# Altium PCB Accumulator_HotDog_v2.PcbDoc
Units mm, origin at the board's own origin, x right, y up, seen from the top; angles counter-clockwise.
Board outline 537 x 59.5 mm, 2 copper layers (Top Layer, Bottom Layer), stack 1.27 mm thick; 117 components, 86 nets, 247 pads, 10 vias.
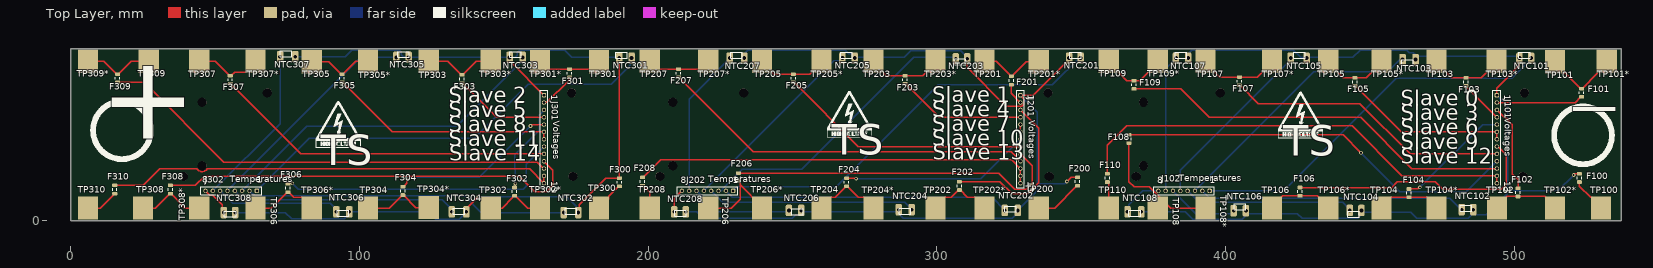
[diagram p0: Top Layer view]
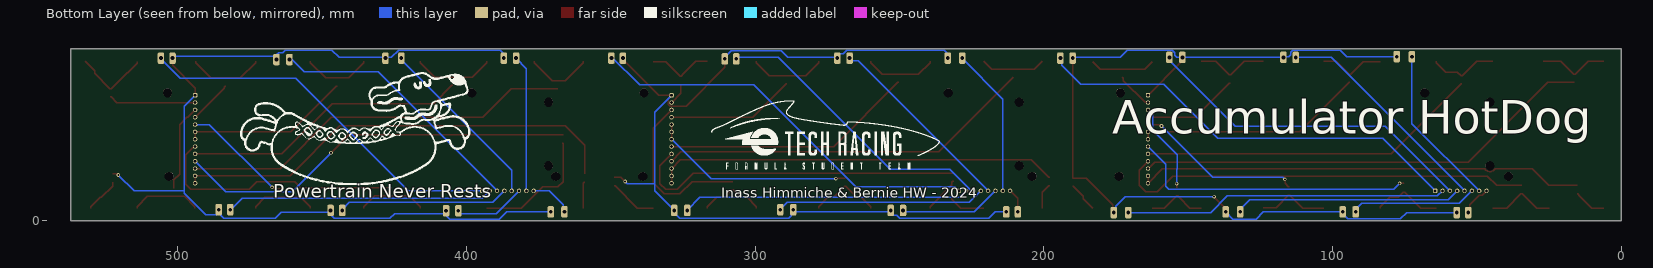
[diagram p1: Bottom Layer view, seen from below]
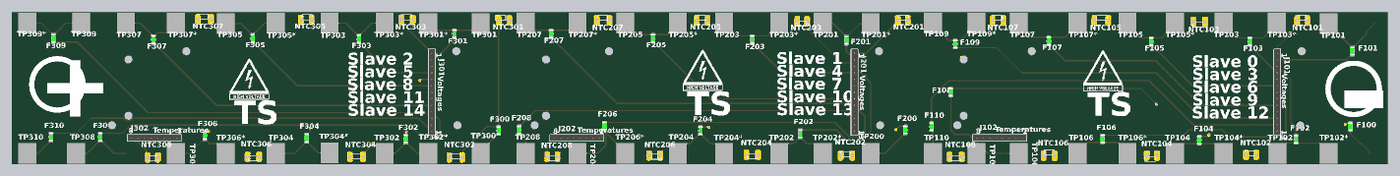
[diagram p2: 3D render of the assembled board from above, using the file's embedded part models]

## Layer stack, top to bottom
Top Solder: solder mask 0.01, Solder Resist, Dk 3.5
Top Layer: signal copper 0.035
Dielectric 2: prepreg 0.1, PP-006, Dk 4.1
Dielectric 1: dielectric 1, FR-4, Dk 4.8
Dielectric 3: prepreg 0.1, PP-006, Dk 4.1
Bottom Layer: signal copper 0.035
Bottom Solder: solder mask 0.01, Solder Resist, Dk 3.5

## Board outline
0,0 0,59.5 537,59.5 537,0

## Design rules (kind name [scope] priority, off if disabled: settings)
Clearance [All] p1: gap=0.2 ignorepadtopadclearanceinfootprint=FALSE
ComponentClearance [All] p1: gap=0.2 collisioncheckmode=3 verticalgap=0.2 showdistances=FALSE
HoleSize [All] p1: absolutevalues=TRUE maxlimit=5 minlimit=0.15 maxpercent=80.000 minpercent=20.000
PlaneClearance [All] p1: clearance=0.5
PlaneConnect [All] p1: planeconnectstyle=Relief reliefexpansion=0.5 reliefentries=4 reliefconductorwidth=0.2 reliefairgap=0.5
PolygonConnect [All] p1: connectstyle=Direct reliefconductorwidth=0.2 reliefentries=4 polygonreliefangle="45 Angle" airgapwidth=0.5
RoomDefinition [InComponentClass('Accumulator_HotDog_v2')] p1: confinementstyle=ConfineIn formatcopy=TRUE lockcomponents=FALSE outline 0,0 537,0 537,59.5 0,59.5
RoutingCorners [All] p1: cornerstyle=45-Degree minsetback=2 maxsetback=2.5
RoutingVias [All] p1: holewidth=0.3 width=0.7 viastyle="Through Hole" minholewidth=0.2 minwidth=0.5 maxholewidth=5 maxwidth=8
SilkToSilkClearance [All] p1: silktosilkclearance=0
SolderMaskExpansion [All] p1: expansion=0.102 istentingtop=FALSE
Width [All] p1: maxlimit=5 minlimit=0.2 preferedwidth=0.5
24 further rules are at their usual default settings.

## Components (designator, comment, footprint, x,y, rotation, side; value= is the part's Value field where it differs from the comment)
F100 "0437001.WRA" Fuse_1206 522.5,14.75 r90 top
F101 "0437001.WRA" Fuse_1206 523.25,44.25 r270 top
F102 "0437001.WRA" Fuse_1206 501.25,9.75 r90 top
F103 "0437001.WRA" Fuse_1206 483.25,48 r270 top
F104 "0437001.WRA" Fuse_1206 463.5,9.5 r90 top
F105 "0437001.WRA" Fuse_1206 444.75,48 r270 top
F106 "0437001.WRA" Fuse_1206 425.75,10 r90 top
F107 "0437001.WRA" Fuse_1206 404.75,48.25 r270 top
F108 "0437001.WRA" Fuse_1206 366.5,28.25 r90 top
F109 "0437001.WRA" Fuse_1206 368.25,47 r270 top
F110 "0437001.WRA" Fuse_1206 359,14.75 r90 top
F200 "0437001.WRA" Fuse_1206 348.75,13.5 r90 top
F201 "0437001.WRA" Fuse_1206 325.75,48.5 r270 top
F202 "0437001.WRA" Fuse_1206 307.75,12 r90 top
F203 "0437001.WRA" Fuse_1206 289,48.75 r270 top
F204 "0437001.WRA" Fuse_1206 268.75,13.25 r90 top
F205 "0437001.WRA" Fuse_1206 250.25,49.25 r270 top
F206 "0437001.WRA" Fuse_1206 231.25,15 r90 top
F207 "0437001.WRA" Fuse_1206 210.5,51 r270 top
F208 "0437001.WRA" Fuse_1206 198,13.5 r90 top
F300 "0437001.WRA" Fuse_1206 190,13.25 r90 top
F301 "0437001.WRA" Fuse_1206 172.75,51 r270 top
F302 "0437001.WRA" Fuse_1206 153.75,10 r90 top
F303 "0437001.WRA" Fuse_1206 135.5,49 r270 top
F304 "0437001.WRA" Fuse_1206 115,10.25 r90 top
F305 "0437001.WRA" Fuse_1206 94,49.25 r270 top
F306 "0437001.WRA" Fuse_1206 75.25,11.25 r90 top
F307 "0437001.WRA" Fuse_1206 55.25,48.75 r270 top
F308 "0437001.WRA" Fuse_1206 34.5,10.75 r90 top
F309 "0437001.WRA" Fuse_1206 16.25,49.25 r270 top
F310 "0437001.WRA" Fuse_1206 15.25,10.75 r90 top
J101 "WR-PHD 13 socket header" 61301311821 493.9,28.155 r270 top
J102 "J_WR-PHD 8pin Socket Header" 61300811821 385.55,10.29 r180 top
J201 "WR-PHD 13 socket header" 61301311821 328.9,28.155 r270 top
J202 "J_WR-PHD 8pin Socket Header" 61300811821 220.55,10.29 r180 top
J301 "WR-PHD 13 socket header" 61301311821 163.9,28.155 r270 top
J302 "J_WR-PHD 8pin Socket Header" 61300811821 55.55,10.29 r180 top
NTC101 "NXRT15XV103FA1B040" NTC_NXRT15XV103FA1B040#1 503.5,57.25 r0 top
NTC102 "NXRT15XV103FA1B040" NTC_NXRT15XV103FA1B040#2 483.25,4.25 r180 top
NTC103 "NXRT15XV103FA1B040" NTC_NXRT15XV103FA1B040#3 463,54.75 r180 top
NTC104 "NXRT15XV103FA1B040" NTC_NXRT15XV103FA1B040#4 444.25,2.146 r180 top
NTC105 "NXRT15XV103FA1B040" NTC_NXRT15XV103FA1B040#5 425.5,57.25 r0 top
NTC106 "NXRT15XV103FA1B040" NTC_NXRT15XV103FA1B040#6 405,4.75 r0 top
NTC107 "NXRT15XV103FA1B040" NTC_NXRT15XV103FA1B040#7 384.5,57.25 r0 top
NTC108 "NXRT15XV103FA1B040" NTC_NXRT15XV103FA1B040#8 368.5,2.5 r0 top
NTC201 "NXRT15XV103FA1B040" NTC_NXRT15XV103FA1B040#9 348,57.25 r0 top
NTC202 "NXRT15XV103FA1B040" NTC_NXRT15XV103FA1B040#10 325.5,4 r180 top
NTC203 "NXRT15XV103FA1B040" NTC_NXRT15XV103FA1B040#11 308,55 r180 top
NTC204 "NXRT15XV103FA1B040" NTC_NXRT15XV103FA1B040#12 289,3.25 r0 top
NTC205 "NXRT15XV103FA1B040" NTC_NXRT15XV103FA1B040#13 268.75,57.25 r0 top
NTC206 "NXRT15XV103FA1B040" NTC_NXRT15XV103FA1B040#14 251.75,3 r0 top
NTC207 "NXRT15XV103FA1B040" NTC_NXRT15XV103FA1B040#15 230.5,57.25 r0 top
NTC208 "NXRT15XV103FA1B040" NTC_NXRT15XV103FA1B040#16 211.25,2.5 r0 top
NTC301 "NXRT15XV103FA1B040" NTC_NXRT15XV103FA1B040#17 190.75,57.25 r0 top
NTC302 "NXRT15XV103FA1B040" NTC_NXRT15XV103FA1B040#18 173.25,3.25 r180 top
NTC303 "NXRT15XV103FA1B040" NTC_NXRT15XV103FA1B040#19 154,57.5 r0 top
NTC304 "NXRT15XV103FA1B040" NTC_NXRT15XV103FA1B040#20 134.5,3.25 r180 top
NTC305 "NXRT15XV103FA1B040" NTC_NXRT15XV103FA1B040#21 115.25,57.5 r0 top
NTC306 "NXRT15XV103FA1B040" NTC_NXRT15XV103FA1B040#12 94.25,2.5 r0 top
NTC307 "NXRT15XV103FA1B040" NTC_NXRT15XV103FA1B040#22 74.5,57.75 r0 top
NTC308 "NXRT15XV103FA1B040" NTC_NXRT15XV103FA1B040#16 55.25,2.25 r0 top
TP100 "TestPoint" TestPoint#1 547.5,2.5 r90 top
TP101 "TestPoint" TestPoint#2 536.25,54.58 r90 top
TP101* "TestPoint" TestPoint#3 542.5,55 r90 top
TP102 "TestPoint" TestPoint#4 515,2.5 r90 top
TP102* "TestPoint" TestPoint#5 525,2.5 r90 top
TP103 "TestPoint" TestPoint#6 496,55 r90 top
TP103* "TestPoint" TestPoint#7 507.75,55 r90 top
TP104 "TestPoint" TestPoint#8 467.5,5 r90 top
TP104* "TestPoint" TestPoint#9 482.5,5 r90 top
TP105 "TestPoint" TestPoint#10 453.5,54.83 r90 top
TP105* "TestPoint" TestPoint#11 463,54.83 r90 top
TP106 "TestPoint" TestPoint#12 420,2.5 r90 top
TP106* "TestPoint" TestPoint#13 435,2.5 r90 top
TP107 "TestPoint" TestPoint#14 412.5,54.83 r90 top
TP107* "TestPoint" TestPoint#15 425.75,54.83 r90 top
TP108 "TestPoint" TestPoint#16 397.5,3.42 r90 top
TP108* "TestPoint" TestPoint#13 392.5,2.5 r90 top
TP109 "TestPoint" TestPoint#15 369.25,54.83 r90 top
TP109* "TestPoint" TestPoint#17 383.5,55 r90 top
TP110 "TestPoint" TestPoint#18 362.5,5 r90 top
TP200 "TestPoint" TestPoint#19 335.75,2.5 r90 top
TP201 "TestPoint" TestPoint#20 320.75,54.83 r90 top
TP201* "TestPoint" TestPoint#21 335.5,54.66 r90 top
TP202 "TestPoint" TestPoint#22 307.5,2.5 r90 top
TP202* "TestPoint" TestPoint#23 325,5 r90 top
TP203 "TestPoint" TestPoint#24 287.5,52.5 r90 top
TP203* "TestPoint" TestPoint#25 298,52.33 r90 top
TP204 "TestPoint" TestPoint#26 272.5,5 r90 top
TP204* "TestPoint" TestPoint#27 285,5 r90 top
TP205 "TestPoint" TestPoint#28 245,55 r90 top
TP205* "TestPoint" TestPoint#29 251.25,54.83 r90 top
TP206 "TestPoint" TestPoint#30 227.5,5 r90 top
TP206* "TestPoint" TestPoint#31 240,5 r90 top
TP207 "TestPoint" TestPoint#32 212.5,55 r90 top
TP207* "TestPoint" TestPoint#33 222.5,55 r90 top
TP208 "TestPoint" TestPoint#34 181.25,5.17 r90 top
TP300 "TestPoint" TestPoint#35 162.5,2.92 r90 top
TP301 "TestPoint" TestPoint#36 159.5,54.66 r90 top
TP301* "TestPoint" TestPoint#37 142.5,54.41 r90 top
TP302 "TestPoint" TestPoint#38 134.75,2.67 r90 top
TP302* "TestPoint" TestPoint#39 142.25,5.17 r90 top
TP303 "TestPoint" TestPoint#40 108,52.33 r90 top
TP303* "TestPoint" TestPoint#41 114.5,52.33 r90 top
TP304 "TestPoint" TestPoint#42 111.25,5.25 r90 top
TP304* "TestPoint" TestPoint#43 118.5,5.17 r90 top
TP305 "TestPoint" TestPoint#44 79.25,52.16 r90 top
TP305* "TestPoint" TestPoint#45 85.25,52.33 r90 top
TP306 "TestPoint" TestPoint#46 81.5,2.67 r90 top
TP306* "TestPoint" TestPoint#47 89,5 r90 top
TP307 "TestPoint" TestPoint#48 44.25,54.83 r90 top
TP307* "TestPoint" TestPoint#49 54.25,54.58 r90 top
TP308 "TestPoint" TestPoint#50 45,5 r90 top
TP308* "TestPoint" TestPoint#51 58.5,-10.5 r90 top
TP309 "TestPoint" TestPoint#52 40,55 r90 top
TP309* "TestPoint" TestPoint#53 12.5,55 r90 top
TP310 "TestPoint" TestPoint#54 12.5,5 r90 top

## Footprints (in the part's own frame and the unit in brackets; to place one, negate y for a bottom-side part, rotate by r counter-clockwise, add the part's x,y. Pads: shape width x height; smd on the part's side, far side on the other; paste and mask are expansions set on the pad)
61300811821 [mm] "Socket Header, Pitch 2.54 mm, THT, Vertical, single row, 8p"
  rrect50% 1.52x1.52 hole 1.02: 1(-8.89,0)
  round 1.52 hole 1.02: 2(-6.35,0) 3(-3.81,0) 4(-1.27,0) 5(1.27,0) 6(3.81,0) 7(6.35,0) 8(8.89,0)
  silkscreen extent -10.54,-1.35 10.54,1.35, body extent -10.41,-1.25 10.41,1.25, height 8.55
61301311821 [mm] "Socket Header, Pitch 2.54 mm, THT, Vertical, single row, 13p"
  rrect50% 1.52x1.52 hole 1.02: 1(-15.24,0)
  round 1.52 hole 1.02: 2(-12.7,0) 3(-10.16,0) 4(-7.62,0) 5(-5.08,0) 6(-2.54,0) 7(0,0) 8(2.54,0) 9(5.08,0) 10(7.62,0) 11(10.16,0) 12(12.7,0) 13(15.24,0)
  silkscreen extent -16.89,-1.35 16.89,1.35, body extent -16.76,-1.25 16.76,1.25, height 8.55
Fuse_1206 [mm] "Chip Resistor, 2-Leads, Body 3,20x1,58mm, IPC Medium Density"
  rrect50% 1.25x1.75 smd: 1(-1.425,0) 2(1.425,0)
  silkscreen extent -0.4,-0.77 0.4,0.77, body extent -1.6,-0.79 1.6,0.79, height 0.86
NTC_NXRT15XV103FA1B040#1 [mm]
  rrect50% 2.25x4 hole 1.3: 1(-1.75,-1) 2(2.25,-1)
  silkscreen extent -2,-1 2,1
NTC_NXRT15XV103FA1B040#2 [mm]
  rrect50% 2.25x4 hole 1.3: 1(-2.5,0.5) 2(1.5,0.5)
  silkscreen extent -2,-1 2,1
NTC_NXRT15XV103FA1B040#3 [mm]
  rrect50% 2.25x4 hole 1.3: 1(-2.75,-1) 2(1.75,-1)
  silkscreen extent -2,-1 2,1
NTC_NXRT15XV103FA1B040#4 [mm]
  rrect50% 2.25x4 hole 1.3: 1(-2.75,-1.354) 2(1.25,-1.354)
  silkscreen extent -2,-1 2,1
NTC_NXRT15XV103FA1B040#5 [mm]
  rrect50% 2.25x4 hole 1.3: 1(-3,-1) 2(2.5,-1)
  silkscreen extent -2,-1 2,1
NTC_NXRT15XV103FA1B040#6 [mm]
  rrect50% 2.25x4 hole 1.3: 1(-2.25,-1.354) 2(2,-1.354)
  silkscreen extent -2,-1 2,1
NTC_NXRT15XV103FA1B040#7 [mm]
  rrect50% 2.25x4 hole 1.3: 1(-1.75,-1) 2(2.5,-1)
  silkscreen extent -2,-1 2,1
NTC_NXRT15XV103FA1B040#8 [mm]
  rrect50% 2.25x4 hole 1.3: 1(-2.5,0.5) 2(2.25,0.5)
  silkscreen extent -2,-1 2,1
NTC_NXRT15XV103FA1B040#9 [mm]
  rrect50% 2.25x4 hole 1.3: 1(-2.25,-1) 2(1.75,-1)
  silkscreen extent -2,-1 2,1
NTC_NXRT15XV103FA1B040#10 [mm]
  rrect50% 2.25x4 hole 1.3: 1(-2.5,0.5) 2(2,0.5)
  silkscreen extent -2,-1 2,1
NTC_NXRT15XV103FA1B040#11 [mm]
  rrect50% 2.25x4 hole 1.3: 1(-2.5,-1) 2(1.5,-1)
  silkscreen extent -2,-1 2,1
NTC_NXRT15XV103FA1B040#12 [mm]
  rrect50% 2.25x4 hole 1.3: 1(-2.25,0.5) 2(2.25,0.5)
  silkscreen extent -2,-1 2,1
NTC_NXRT15XV103FA1B040#13 [mm]
  rrect50% 2.25x4 hole 1.3: 1(-1.5,-1) 2(2.75,-1)
  silkscreen extent -2,-1 2,1
NTC_NXRT15XV103FA1B040#14 [mm]
  rrect50% 2.25x4 hole 1.3: 1(-3,0.5) 2(1.25,0.5)
  silkscreen extent -2,-1 2,1
NTC_NXRT15XV103FA1B040#15 [mm]
  rrect50% 2.25x4 hole 1.3: 1(-2.25,-1) 2(2.75,-1)
  silkscreen extent -2,-1 2,1
NTC_NXRT15XV103FA1B040#16 [mm]
  rrect50% 2.25x4 hole 1.3: 1(-2.25,0.5) 2(1.75,0.5)
  silkscreen extent -2,-1 2,1
NTC_NXRT15XV103FA1B040#17 [mm]
  rrect50% 2.25x4 hole 1.3: 1(-0.75,-1) 2(3.5,-1)
  silkscreen extent -2,-1 2,1
NTC_NXRT15XV103FA1B040#18 [mm]
  rrect50% 2.25x4 hole 1.3: 1(-2.5,0.5) 2(2.5,0.5)
  silkscreen extent -2,-1 2,1
NTC_NXRT15XV103FA1B040#19 [mm]
  rrect50% 2.25x4 hole 1.3: 1(-2,-1) 2(2.5,-1)
  silkscreen extent -2,-1 2,1
NTC_NXRT15XV103FA1B040#20 [mm]
  rrect50% 2.25x4 hole 1.3: 1(-2.5,0.25) 2(2.5,0.25)
  silkscreen extent -2,-1 2,1
NTC_NXRT15XV103FA1B040#21 [mm]
  rrect50% 2.25x4 hole 1.3: 1(-2.5,-1) 2(1.75,-1)
  silkscreen extent -2,-1 2,1
NTC_NXRT15XV103FA1B040#22 [mm]
  rrect50% 2.25x4 hole 1.3: 1(-2,-1) 2(3.25,-1)
  silkscreen extent -2,-1 2,1
TestPoint#1 [mm]
  rect 8x7 smd: 1(1.83,17.5)
TestPoint#2 [mm]
  rect 8x7 smd: 1(0.42,22.25)
TestPoint#3 [mm]
  rect 8x7 smd: 1(0.17,10.5)
TestPoint#4 [mm]
  rect 8x7 smd: 1(1.83,21)
TestPoint#5 [mm]
  rect 8x7 smd: 1(1.83,11)
TestPoint#6 [mm]
  rect 8x7 smd: 1(0.17,23)
TestPoint#7 [mm]
  rect 8x7 smd: 1(0.17,14)
TestPoint#8 [mm]
  rect 8x7 smd: 1(-0.67,13.5)
TestPoint#9 [mm]
  rect 8x7 smd: 1(-0.67,9.5)
TestPoint#10 [mm]
  rect 8x7 smd: 1(0.34,18)
TestPoint#11 [mm]
  rect 8x7 smd: 1(0.34,9)
TestPoint#12 [mm]
  rect 8x7 smd: 1(1.83,4)
TestPoint#13 [mm]
  rect 8x7 smd: 1(1.83,-0.5)
TestPoint#14 [mm]
  rect 8x7 smd: 1(0.34,19.5)
TestPoint#15 [mm]
  rect 8x7 smd: 1(0.34,9.75)
TestPoint#16 [mm]
  rect 8x7 smd: 1(0.91,21)
TestPoint#17 [mm]
  rect 8x7 smd: 1(0.17,7)
TestPoint#18 [mm]
  rect 8x7 smd: 1(-0.67,3)
TestPoint#19 [mm]
  rect 8x7 smd: 1(1.83,0.5)
TestPoint#20 [mm]
  rect 8x7 smd: 1(0.34,4.25)
TestPoint#21 [mm]
  rect 8x7 smd: 1(0.34,0.25)
TestPoint#22 [mm]
  rect 8x7 smd: 1(1.83,8)
TestPoint#23 [mm]
  rect 8x7 smd: 1(-0.67,8.5)
TestPoint#24 [mm]
  rect 8x7 smd: 1(2.67,9.5)
TestPoint#25 [mm]
  rect 8x7 smd: 1(2.84,-1.5)
TestPoint#26 [mm]
  rect 8x7 smd: 1(-0.67,12.5)
TestPoint#27 [mm]
  rect 8x7 smd: 1(-0.67,7)
TestPoint#28 [mm]
  rect 8x7 smd: 1(0.17,5.6)
TestPoint#29 [mm]
  rect 8x7 smd: 1(0.34,-8.75)
TestPoint#30 [mm]
  rect 8x7 smd: 1(-0.67,6.7)
TestPoint#31 [mm]
  rect 8x7 smd: 1(-0.67,0.6)
TestPoint#32 [mm]
  rect 8x7 smd: 1(0.17,12)
TestPoint#33 [mm]
  rect 8x7 smd: 1(0.17,1.7)
TestPoint#34 [mm]
  rect 8x7 smd: 1(-0.84,-19.25)
TestPoint#35 [mm]
  rect 8x7 smd: 1(1.41,-20.5)
TestPoint#36 [mm]
  rect 8x7 smd: 1(0.34,-23.5)
TestPoint#37 [mm]
  rect 8x7 smd: 1(0.59,-20)
TestPoint#38 [mm]
  rect 8x7 smd: 1(1.66,-10.75)
TestPoint#39 [mm]
  rect 8x7 smd: 1(-0.84,-20.25)
TestPoint#40 [mm]
  rect 8x7 smd: 1(2.84,-16)
TestPoint#41 [mm]
  rect 8x7 smd: 1(2.84,-31)
TestPoint#42 [mm]
  rect 8x7 smd: 1(-0.92,8.25)
TestPoint#43 [mm]
  rect 8x7 smd: 1(-0.67,-5.5)
TestPoint#44 [mm]
  rect 8x7 smd: 1(2.84,-4.25)
TestPoint#45 [mm]
  rect 8x7 smd: 1(2.84,-17.75)
TestPoint#46 [mm]
  rect 8x7 smd: 1(1.66,17.5)
TestPoint#47 [mm]
  rect 8x7 smd: 1(-0.67,5.5)
TestPoint#48 [mm]
  rect 8x7 smd: 1(0.34,-0.25)
TestPoint#49 [mm]
  rect 8x7 smd: 1(0.59,-9.75)
TestPoint#50 [mm]
  rect 8x7 smd: 1(-0.67,20)
TestPoint#51 [mm]
  rect 8x7 smd: 1(14.83,14)
TestPoint#52 [mm]
  rect 8x7 smd: 1(0.17,13)
TestPoint#53 [mm]
  rect 8x7 smd: 1(0.17,6.5)
TestPoint#54 [mm]
  rect 8x7 smd mask+0.102: 1(-0.67,6.5)

## Part data
F100 F101 F102 F103 F104 F105 F106 F107 F108 F109 F110 F200 F201 F202 F203 F204 F205 F206 F207 F208 F300 F301 F302 F303 F304 F305 F306 F307 F308 F309 F310: library part Fuse_1A_63V_1206, "Fuse Chip Fast Acting 1A 63V SMD Solder Pad 1206 Ceramic T/R Automotive", Case Code (Imperial)=1206, Case Code (Metric)=3216, Current Rating=1A, Manufacturer=Littelfuse, Max Operating Temperature=150°C, Min Operating Temperature=-55°C, Supplier Part Number 1=F10001CT-ND, Voltage Rating (AC)=63V, Approvals=CSA,cURus, Case/Package=1206, Category=Fuses, ComponentLink1Description=https://www.littelfuse.com/~/media/electronics/datasheets/fuses/littelfuse_fuse_437a_datasheet.pdf.pdf?src-supplier=Digi-Key, ComponentLink1URL=https://www.littelfuse.com/~/media/electronics/datasheets/fuses/littelfuse_fuse_437a_datasheet.pdf.pdf?src-supplier=Digi-Key, ComponentLink2Description="Where buy it", ComponentLink2URL=https://www.mouser.es/ProductDetail/Littelfuse/0437001WRA?qs=DXv0QSHKF4z9CJhPXjxR%252BA%3D%3D, Fuse Type="Board Mount (Cartridge Style Excluded)", Manufacturer Part Number=0437001.WRA, Mount="Surface Mount", Packaging="Tape and Reel", Pricing 1="1=1,52000, 5=1,47000, 10=1,37600, 50=1,13860, 100=0,94880, 250=0,92508, 500=0,78276, 1000=0,68788 (USD)", RoHS=Yes, Stock 1=5820, Supplier 1=Digi-Key, Voltage Rating (DC)=63V
J101 J201 J301: library part "J_WR-PHD 13pin Socket Header", "13 pin Socket Header 61301311821", ComponentLink1Description=Datasheet, ComponentLink1URL=https://www.we-online.com/components/products/datasheet/61301311821.pdf
J102 J202 J302: "8pin Socket Header 2.54 mm", Supplier Part Number 1=732-61300811821-ND, Supplier 1=Digi-Key
NTC101 NTC102 NTC103 NTC104 NTC105 NTC106 NTC107 NTC108 NTC201 NTC202 NTC203 NTC204 NTC205 NTC206 NTC207 NTC208 NTC301 NTC302 NTC303 NTC304 NTC305 NTC306 NTC307 NTC308: library part NTC_NXRT15XV103FA1B040, "NXR Series 10 kOhm 3900 K ±1% Bead NTC Thermistor Sensor", Manufacturer 1=Murata, Max Operating Temperature=125°C, Max Power Dissipation=7.5mW, Min Operating Temperature=-40°C, Package Quantity=500, Resistance=10kR, Resistance Tolerance=1%, Supplier Part Number 1=490-7171-ND, Category=Thermistors, ComponentLink1Description=http://www.mouser.com/ds/2/281/r44e-3685.pdf?src-supplier=Mouser, ComponentLink1URL=http://www.mouser.com/ds/2/281/r44e-3685.pdf?src-supplier=Mouser, ComponentLink2Description=https://www.murata.com/en-us/products/productdata/8796838297630/S0423E.pdf?src-supplier=Digi-Key, ComponentLink2URL=https://www.murata.com/en-us/products/productdata/8796838297630/S0423E.pdf?src-supplier=Digi-Key, ComponentLink3Description=http://www.murata.com/~/media/webrenewal/support/library/catalog/products/thermistor/ntc/r44e.ashx?src-supplier=Avnet, ComponentLink3URL=http://www.murata.com/~/media/webrenewal/support/library/catalog/products/thermistor/ntc/r44e.ashx?src-supplier=Avnet, Height=2mm, Lead Diameter=0.4mm, Lead Free="Lead Free", Lead Pitch=2.5mm, Length=5mm, Manufacturer Part Number 1=NXRT15XV103FA1B040, Mount="Through Hole", Number of Pins=2, Packaging=Bulk, Power Rating=7.5mW, Pricing 1="1=0,63000, 5=0,60000, 10=0,52300, 25=0,45920, 50=0,38140, 100=0,32490, 500=0,28248, 1000=0,24717, 5000=0,21892 (USD)", RoHS=Yes, RoHS Compliant=No, Series=NXR, Stock 1=38458, Supplier 1=Digi-Key, Termination=Radial, Tolerance=1%, Width=4mm
TP100 TP101 TP101* TP102 TP102* TP103 TP103* TP104 TP104* TP105 TP105* TP106 TP106* TP107 TP107* TP108 TP108* TP109 TP109* TP110 TP200 TP201 TP201* TP202 TP202* TP203 TP203* TP204 TP204* TP205 TP205* TP206 TP206* TP207 TP207* TP208 TP300 TP301 TP301* TP302 TP302* TP303 TP303* TP304 TP304* TP305 TP305* TP306 TP306* TP307 TP307* TP308 TP308* TP309 TP309* TP310: "Test Point 1x1 mm", Category=TestPoint

## Free pads (board coordinates)
  round 3 hole 3.2: 0(68.1,44.21) 0(173.475,44.21) 0(173.925,15.29) 0(204.04,15.29) 0(208.5,19) 0(208.5,41) 0(233.1,44.21) 0(338.475,44.21) 0(338.925,15.29) 0(369.04,15.29) 0(371.5,19) 0(371.5,41) 0(398.1,44.21) 0(503.475,44.21) 1(39.04,15.29) 1(45.5,19) 1(45.5,41)
  round 3 hole 3.2 mask+0.5: 0(502.925,15.29)

## Via types
v1: diameter 1.27, hole 0.711, Top Layer to Bottom Layer, 10 vias

## Nets (pads, with @x,y where several pads share a name; then routed paths per layer and width w, separated by ;. In a path a pad name is that pad's centre, name@x,y a point inside that pad or via, vN(x,y) a via of type N, cw(c..) or ccw(c..) an arc to the next point about the centre after c; other vN are vias at no path point)
c1_1: F101.2 J101.2 | length 30.2
  Top Layer w0.5: J101.2 521.03,40.855 523,42.825 F101.2
c1_2: F201.2 J201.2 | length 7.5
  Top Layer w0.5: F201.2 325.75,44.005 J201.2
c1_3: F301.2 J301.2 | length 12.9
  Top Layer w0.5: J301.2 163.99,40.945 164.945,40.945 172.493,48.493 172.493,49.318 F301.2
c2_1: F102.2 J101.3 | length 30.4
  Top Layer w0.5: J101.3 496.53,35.685 496.815,35.685 499.25,33.25 499.25,16.066 501.25,14.066 F102.2
c2_2: F202.2 J201.3 | length 58.7
  Top Layer w0.5: F202.2 321.825,13.425 326,9.25 331.5,9.25 335.25,13 335.25,31.965 J201.3
c2_3: F302.2 J301.3 | length 31.3
  Top Layer w0.5: F302.2 153.875,11.55 153.875,12.625 v1(154,12.75)
  Bottom Layer w0.5: v1(154,12.75) 154,17.729 153.75,17.979 153.75,22.75 162.29,31.29 162.29,36.442 163.9,38.052 J301.3
c3_1: F103.2 J101.4 | length 15.3
  Top Layer w0.5: F103.2 483.466,46.575 483.836,46.205 483.836,45.839 J101.4
c3_2: F203.2 J201.4 | length 44.7
  Top Layer w0.5: F203.2 289.25,47.325 300.8,35.775 J201.4
c3_3: F303.2 J301.4 | length 33.3
  Top Layer w0.5: F303.2 135.75,47.575 147.55,35.775 J301.4
c4_1: F104.2 J101.5 | length 39.6
  Top Layer w0.5: F104.2 466.474,10.925 467.031,11.482 v1(467.239,11.482)
  Bottom Layer w0.5: v1(467.239,11.482) 488.992,33.235 J101.5
c4_2: F204.2 J201.5 J201.6 J201.7 | length 71
  Top Layer w0.5: F204.2 268.837,14.587 271.912,14.587 v1(272,14.5) ; J201.7 J201.6 J201.5
  Bottom Layer w0.5: v1(272,14.5) 315.245,14.5 J201.7
c4_3: F304.2 J301.5 | length 58.6
  Top Layer w0.5: F304.2 115.25,11.675 116.44,12.865 116.44,14.19 v1(116.5,14.25) ; v1(159.25,32.75) 159.735,33.235 J301.5
  Bottom Layer w0.5: v1(116.5,14.25) 117.25,15 141.5,15 v1(159.25,32.75)
c5_1: F105.2 J101.6 J101.7 | length 58.3
  Top Layer w0.5: F105.2 445,46.575 460.88,30.695 J101.6 J101.7
c5_2: F205.2 J201.8 | length 87.8
  Top Layer w0.5: F205.2 250.5,47.825 272.71,25.615 J201.8
c5_3: F305.2 J301.6 J301.7 | length 79.5
  Top Layer w0.5: F305.2 94.25,47.825 111.38,30.695 J301.6 J301.7
c6_1: F106.2 J101.8 | length 89
  Top Layer w0.5: F106.2 457.425,11.425 459.5,13.5 472.5,13.5 475.25,10.75 495.5,10.75 497.25,12.5 497.25,22.75 494.58,25.42 494.095,25.42 J101.8
c6_2: F206.2 J201.9 | length 117
  Top Layer w0.5: F206.2 321.325,16.425 327,10.75 331,10.75 333,12.75 333,18.975 J201.9
c6_3: F306.2 J301.8 | length 100.3
  Top Layer w0.5: F306.2 75.586,13.011 75.812,12.987 75.977,12.987 v1(76.75,12.87)
  Bottom Layer w0.5: v1(76.75,12.87) 78.87,10.75 156.707,10.75 157.75,11.793 157.75,19.465 J301.8
c7_1: F107.2 J101.9 | length 99
  Top Layer w0.5: F107.2 405,46.825 411.325,40.5 446.5,40.5 463.925,23.075 J101.9
c7_2: F207.2 J201.10 | length 130.4
  Top Layer w0.5: F207.2 236.325,23.75 325.685,23.75 J201.10
c7_3: F307.2 J301.9 | length 118.7
  Top Layer w0.5: F307.2 55.5,47.325 79.75,23.075 J301.9
c8_1: F108.2 J101.10 | length 139.9
  Top Layer w0.5: F108.2 440.637,29.675 v1(446.832,23.481)
  Bottom Layer w0.5: v1(446.832,23.481) 460.312,10 483.365,10 J101.10
c8_2: F208.2 J201.11 J201.12 J201.13 | length 139.8
  Top Layer w0.5: F208.2 198.25,14.925 204.375,21.05 325.845,21.05 J201.11 J201.12 J201.13
c8_3: F308.2 J301.10 | length 146.5
  Top Layer w0.5: F308.2 43.175,12.175 46.335,15.335 155.415,15.335 160.75,10 164.75,10 167,12.25 167,17.435 J301.10
c9_1: F109.2 J101.11 | length 137.1
  Top Layer w0.5: F109.2 384.425,45.575 394.25,35.75 446.75,35.75 464.505,17.995 J101.11
c9_3: F309.2 J301.11 | length 160
  Top Layer w0.5: F309.2 25.425,47.825 53,20.25 161.645,20.25 J301.11
c10_1: F110.2 J101.12 J101.13 | length 157.2
  Top Layer w0.5: F110.2 359,26 365.75,32.75 443.75,32.75 461.045,15.455 J101.12 J101.13
c10_3: F310.2 J301.12 J301.13 | length 156.4
  Top Layer w0.5: F310.2 25.087,12.175 30.912,18 43.645,18 43.791,17.854 43.821,17.824 ccw(c45.5,19) 47.179,17.824 47.209,17.854 47.355,18 158.815,18 158.961,17.854 J301.13 J301.12
GND_Slave_1: F100.2 J101.1 NTC101.1 NTC102.1 NTC103.1 NTC104.1 NTC105.2 NTC106.2 NTC107.2 NTC108.2 | length 336
  Top Layer w0.5: J101.1 493.9,45.875 501.75,53.725 NTC101.1@501.75,56.75 ; v1(520.5,15.75) 520.708,15.75 521.133,16.175 F100.2
  Bottom Layer w0.5: NTC108.2 386.014,3 388.514,0.5 405.729,0.5 406.75,1.521 406.75,2.396 424.796,2.396 426.442,0.75 445.771,0.75 447,1.979 447,2.854 464.014,2.854 466.119,0.75 484,0.75 485.068,1.818 485.068,2.024 485.669,2.625 485.875,2.625 486.5,2 490.25,2 497.75,9.5 497.75,10.25 ; NTC107.2@387,57 387,57.706 388.244,58.95 423.482,58.95 425.932,56.5 428,56.5 444.067,56.5 446.567,59 462.682,59 463.494,58.188 464.899,58.188 465.75,57.336 465.75,57 465.875,56.875 501.625,56.875 NTC101.1@501.75,56.75 ; NTC102.1@485.75,2.75 NTC102.1 ; J101.1 497.75,39.545 497.75,10.25 ; v1(520.5,15.75) 515,10.25 497.75,10.25
GND_Slave_2: F200.2 J201.1 NTC201.1 NTC202.1 NTC203.1 NTC204.1 NTC205.2 NTC206.2 NTC207.2 NTC208.2 | length 319.2
  Top Layer w0.5: NTC203.1@310.5,56.5 NTC203.1 310.5,53.034 323.889,39.645 329.401,39.645 330.11,40.354 330.11,42.185 J201.1 333.27,43.395 345.75,55.875 NTC201.1 NTC201.1@345.75,56.75 ; v1(345,13.5) 346.425,14.925 F200.2
  Bottom Layer w0.5: NTC208.2 216.75,3 219,0.75 249.932,0.75 250.994,1.812 252.149,1.812 253,2.664 253,3 NTC204.1@286.75,3 ; NTC207.2@233.25,57 233.25,57.706 234.494,58.95 268.232,58.95 269.494,57.688 270.649,57.688 271.5,56.836 271.5,56.5 288.692,56.5 290.942,58.75 308.25,58.75 309.443,57.557 309.649,57.557 310.5,56.706 NTC203.1 ; NTC204.1 NTC204.1@286.75,3 ; J201.1 334.75,37.545 334.75,12.75 ; v1(345,13.5) 344.25,12.75 334.75,12.75 ; NTC201.1@345.75,55.875 NTC201.1 NTC201.1@345.75,56.75 ; NTC204.1@286.75,3 287.428,2.322 287.428,1.572 288.25,0.75 326,0.75 328,2.75 NTC202.1 328,3.625 334.75,10.375 334.75,12.75
GND_Slave_3: F300.2 J301.1 NTC301.1 NTC302.1 NTC303.1 NTC304.1 NTC305.2 NTC306.2 NTC307.2 NTC308.2 | length 328.9
  Top Layer w0.5: NTC304.1 137,4.044 141,8.044 v1(141,8.25) ; NTC303.1 152.682,55.818 152.682,54.613 J301.1 ; NTC302.1 176.034,3.034 176.034,5.5 185.209,14.675 F300.2 NTC301.1
  Bottom Layer w0.5: NTC308.2 74.317,2.75 76.517,0.55 94.8,0.55 96.5,2.25 NTC306.2 124,3 126.5,0.5 134.5,0.5 NTC304.1 ; NTC307.2 95.067,56.75 97.267,58.95 113.732,58.95 114.428,58.253 114.428,57.447 115.125,56.75 116.75,56.75 NTC305.2 NTC303.1 ; v1(141,8.25) 171.75,8.25 175.072,4.928 175.072,3.428 NTC302.1 ; NTC303.1@152.682,54.613 152.682,55.818 NTC303.1 ; NTC301.1 189.75,56.5 173.558,56.5 171.108,58.95 155.518,58.95 154.697,58.128 154.697,57.322 153.875,56.5 NTC303.1
NetF100_1: F100.1 TP100.1 | length 12.3
  Top Layer w0.5: F100.1 522.5,11.95 526.37,8.08 526.75,8.08 530,4.83 TP100.1
NetF101_1: F101.1 TP101*.1 TP101.1 | length 26.7
  Top Layer w0.5: TP101.1 514,54.5 517.25,51.25 517.425,51.25 523,45.675 F101.1 523.5,45.675 528.75,50.925 528.75,51.92 TP101*.1
NetF102_1: F102.1 TP102*.1 TP102.1 | length 23.9
  Top Layer w0.5: TP102.1 494,4.83 497.495,8.325 F102.1 510.505,8.325 514,4.83 TP102*.1
NetF103_1: F103.1 TP103*.1 TP103.1 | length 26.1
  Top Layer w0.5: TP103.1 473,54.67 478.245,49.425 F103.1 488.505,49.425 493.75,54.67 TP103*.1
NetF104_1: F104.1 TP104*.1 TP104.1 | length 22.7
  Top Layer w0.5: TP104.1 454,4.825 457.25,8.075 F104.1 469.75,8.075 473,4.825 TP104*.1
NetF105_1: F105.1 TP105*.1 TP105.1 | length 23.8
  Top Layer w0.5: TP105.1 435.5,54.67 440.745,49.425 F105.1 448.755,49.425 454,54.67 TP105*.1
NetF106_1: F106.1 TP106*.1 TP106.1 | length 23.6
  Top Layer w0.5: TP106.1 416,4.83 419.745,8.575 F106.1 431.755,8.575 435.5,4.83 TP106*.1
NetF107_1: F107.1 TP107*.1 TP107.1 | length 28.1
  Top Layer w0.5: TP107.1 393,54.67 397.995,49.675 F107.1 411.005,49.675 416,54.67 TP107*.1
NetF108_1: F108.1 TP108*.1 TP108.1 | length 43.9
  Top Layer w0.5: F108.1@366.75,26.825 F108.1 366.5,13.5 368.311,11.689 373.55,11.689 380.909,4.33 TP108*.1
NetF109_1: F109.1 TP109*.1 TP109.1 | length 23.2
  Top Layer w0.5: TP109.1 359.5,54.67 365.745,48.425 F109.1 370.255,48.425 376.5,54.67 TP109*.1
NetF110_1: F110.1 TP110.1 | length 9.3
  Top Layer w0.5: F110.1 359.13,13.325 359.5,12.955 TP110.1
NetF200_1: F200.1 TP200.1 | length 16.7
  Top Layer w0.5: TP200.1 340.755,4.33 348.5,12.075 F200.1
NetF201_1: F201.1 TP201*.1 TP201.1 | length 23.2
  Top Layer w0.5: TP201.1 320.505,55.17 325.164,50.511 325.164,50.295 325.534,49.925 F201.1 325.966,49.925 326.336,50.295 326.336,50.336 331,55 TP201*.1
NetF202_1: F202.1 TP202*.1 TP202.1 | length 22.8
  Top Layer w0.5: TP202.1 299.5,4.83 302.75,8.08 305.005,8.08 307.5,10.575 F202.1 308,10.575 310.495,8.08 313.25,8.08 316.5,4.83 TP202*.1
NetF203_1: F203.1 TP203*.1 TP203.1 | length 26.2
  Top Layer w0.5: TP203.1 278,54.67 282.495,50.175 F203.1 295.005,50.175 299.5,54.67 TP203*.1
NetF204_1: F204.1 TP204*.1 TP204.1 | length 24.8
  Top Layer w0.5: TP204.1 260,4.83 263.25,8.08 264.755,8.08 268.5,11.825 F204.1 269,11.825 272.745,8.08 274.75,8.08 278,4.83 TP204*.1
NetF205_1: F205.1 TP205*.1 TP205.1 | length 24.9
  Top Layer w0.5: TP205.1 239.4,54.67 243.395,50.675 F205.1 256.005,50.675 260,54.67 TP205*.1
NetF206_1: F206.1 TP206*.1 TP206.1 | length 30
  Top Layer w0.5: TP206.1 228.83,4.33 231.877,7.377 231.877,12.353 ; F206.1 231.466,13.575 231.836,13.205 231.836,12.48 ; 231.877,12.48 231.877,12.353 ; TP206*.1 239.4,4.83 231.877,12.353
NetF207_1: F207.1 TP207*.1 TP207.1 | length 22.6
  Top Layer w0.5: TP207.1 203.245,52.425 F207.1 218.055,52.425 TP207*.1
NetF208_1: F208.1 TP208.1 | length 8.9
  Top Layer w0.5: F208.1 198.25,12.075 200.5,9.825 TP208.1
NetF300_1: F300.1 TP300.1 | length 10.5
  Top Layer w0.5: TP300.1 186.25,7.58 186.25,8.325 189.75,11.825 F300.1
NetF301_1: F301.1 TP301*.1 TP301.1 | length 22.6
  Top Layer w0.5: TP301*.1 165.075,52.425 F301.1 180.425,52.425 TP301.1
NetF302_1: F302.1 TP302*.1 TP302.1 | length 20.6
  Top Layer w0.5: TP302.1 149.505,4.33 153.164,7.989 153.164,8.205 153.534,8.575 F302.1 154,8.575 158.245,4.33 TP302*.1
NetF303_1: F303.1 TP303*.1 TP303.1 | length 25.4
  Top Layer w0.5: TP303.1 130.505,55.17 135.25,50.425 F303.1 135.75,50.425 140.495,55.17 TP303*.1
NetF304_1: F304.1 TP304*.1 TP304.1 | length 24.7
  Top Layer w0.5: TP304.1 110.255,4.33 114.75,8.825 F304.1 115.25,8.825 119.575,4.5 TP304*.1
NetF305_1: F305.1 TP305*.1 TP305.1 | length 23.2
  Top Layer w0.5: TP305.1 89.425,55 93.75,50.675 F305.1 94.25,50.675 98.745,55.17 TP305*.1
NetF306_1: F306.1 TP306*.1 TP306.1 | length 24.3
  Top Layer w0.5: TP306.1 69.505,4.33 75,9.825 F306.1 75.5,9.825 77.245,8.08 80.25,8.08 83.5,4.83 TP306*.1
NetF307_1: F307.1 TP307*.1 TP307.1 | length 23.9
  Top Layer w0.5: TP307.1 50.005,55.17 55,50.175 F307.1 55.5,50.175 56.745,51.42 60.75,51.42 64,54.67 TP307*.1
NetF308_1: F308.1 TP308*.1 TP308.1 | length 23.6
  Top Layer w0.5: TP308.1 29.255,4.33 34.25,9.325 F308.1 34.75,9.325 39.745,4.33 TP308*.1
NetF309_1: F309.1 TP309*.1 TP309.1 | length 24.7
  Top Layer w0.5: TP309*.1 11.505,55.17 16,50.675 F309.1 16.5,50.675 20.995,55.17 TP309.1
NetF310_1: F310.1 TP310.1 | length 11.4
  Top Layer w0.5: TP310.1 10.25,4.33 14.664,8.744 14.664,8.955 15.034,9.325 F310.1
NetJ102_1: J102.1 NTC101.2 | length 131
  Bottom Layer w0.5: J102.1 420.04,10.29 459,49.25 499,49.25 505.75,56 NTC101.2@505.75,56.75
NetJ102_2: J102.2 NTC102.2 | length 93.5
  Bottom Layer w0.5: J102.2 394.44,7.75 477.625,7.75 481.75,3.625 NTC102.2@481.75,2.75
NetJ102_3: J102.3 NTC103.2 | length 91.4
  Bottom Layer w0.5: J102.3 430.57,51.5 456.086,51.5 NTC103.2@461.25,56.664 ; NTC103.2@461.25,57.164 NTC103.2@461.25,57.5
NetJ102_4: J102.4 NTC104.2 | length 59.8
  Bottom Layer w0.5: J102.4 390.86,6.25 440.479,6.25 443,3.729 NTC104.2@443,2.854
NetJ102_5: J102.5 NTC105.1 | length 62
  Bottom Layer w0.5: J102.5 384.28,17.405 422.5,55.625 NTC105.1@422.5,56.5
NetJ102_6: J102.6 NTC106.1 | length 24
  Bottom Layer w0.5: J102.6 389.634,2.396 NTC106.1@402.5,2.396
NetJ102_7: J102.7 NTC107.1 | length 48.2
  Bottom Layer w0.5: J102.7 379.2,52.575 382.75,56.125 NTC107.1@382.75,57
NetJ102_8: J102.8 NTC108.1 | length 14.9
  Bottom Layer w0.5: NTC108.1 366.428,3.428 366.428,5.428 371.29,10.29 J102.8
NetJ202_1: J202.1 NTC201.2 | length 139.6
  Bottom Layer w0.5: J202.1 230.9,11.75 265.182,11.75 300.432,47 340,47 NTC201.2@349.75,56.75
NetJ202_2: J202.2 NTC202.2 | length 100.2
  Bottom Layer w0.5: J202.2 229.19,8 319.125,8 323.5,3.625 NTC202.2@323.5,2.75
NetJ202_3: J202.3 NTC203.2 | length 101.3
  Bottom Layer w0.5: J202.3 224.458,10.388 225.397,10.388 225.69,10.681 225.69,10.791 232.649,17.75 253.25,17.75 292,56.5 NTC203.2@306.5,56.5
NetJ202_4: J202.4 NTC204.2 | length 73
  Bottom Layer w0.5: J202.4 225.86,6.25 288.875,6.25 291.25,3.875 NTC204.2@291.25,3
NetJ202_5: J202.5 NTC205.1 | length 67.3
  Bottom Layer w0.5: J202.5 264.302,55.312 266.399,55.312 267.25,56.164 NTC205.1@267.25,56.5
NetJ202_6: J202.6 NTC206.1 | length 35
  Bottom Layer w0.5: J202.6 224.03,3 NTC206.1@248.75,3
NetJ202_7: J202.7 NTC207.1 | length 52.5
  Bottom Layer w0.5: J202.7 214.2,42.075 228.25,56.125 NTC207.1@228.25,57
NetJ202_8: J202.8 NTC208.1 | length 8.4
  Top Layer w0.5: NTC208.1 209,7.63 J202.8
NetJ302_1: J302.1 NTC301.2 | length 150
  Bottom Layer w0.5: J302.1 82.65,28.5 139.75,28.5 158.5,47.25 187.25,47.25 193.822,53.822 193.822,55.822 NTC301.2
NetJ302_2: J302.2 NTC302.2 | length 112
  Bottom Layer w0.5: J302.2 63.69,8.5 136.5,8.5 142.25,2.75 NTC302.2
NetJ302_3: J302.3 NTC303.2 | length 116.9
  Bottom Layer w0.5: J302.3 81.784,32.714 133.714,32.714 156.5,55.5 NTC303.2
NetJ302_4: J302.4 NTC304.2 | length 78.7
  Bottom Layer w0.5: J302.4 59.86,7.25 128.625,7.25 132,3.875 NTC304.2
NetJ302_5: J302.5 NTC305.1 | length 77.6
  Bottom Layer w0.5: J302.5 100.49,56.5 NTC305.1
NetJ302_6: J302.6 NTC306.1 | length 43.8
  Bottom Layer w0.5: J302.6 56.03,6 89.875,6 92,3.875 NTC306.1
NetJ302_7: J302.7 NTC307.1 | length 56.1
  Bottom Layer w0.5: J302.7 72.5,33.59 NTC307.1
NetJ302_8: J302.8 NTC308.1 | length 10.8
  Top Layer w0.5: J302.8 48.168,8.782 49.218,8.782 52.5,5.5 52.5,3.25 NTC308.1

## Silkscreen, mask and mechanical layers (free items; w line width, h text height)
Top Overlay:
  drawing of 44 lines, arcs and shapes, not listed
  text "Slave 1" at 298.365,39.25 h9
  text "Slave 2" at 130.965,39 h9
  text "Slave 0" at 460.611,38 h9
  text "Voltages" at 495.735,35.515 h4 r270
  text "Voltages" at 330.985,34.765 h4 r270
  text "Voltages" at 166.235,34.515 h4 r270
  text "Slave 4" at 298.453,34.25 h9
  text "Slave 5" at 130.932,34 h9
  text "Slave 3" at 460.69,33 h9
  text "Slave 7" at 298.382,29.25 h9
  text "Slave 8" at 130.84,29 h9
  text "Slave 6" at 460.636,28 h9
  text "Slave 10" at 298.457,24.25 h9
  text "Slave 11" at 130.961,24 h9
  text "Slave 9" at 460.657,23 h9
  text "TS" at 263.626,19.25 h18
  text "Slave 13" at 298.536,19.25 h9
  text "Slave 14" at 131.049,19 h9
  text "TS" at 419.876,19 h18
  text "+" at 10,18.713 h50
  text "Slave 12" at 460.561,18 h9
  text "TS" at 86.626,15.75 h18
  text "Temperatures" at 383.754,12.691 h4
  text "Temperatures" at 55.004,12.441 h4
  text "Temperatures" at 220.754,12.441 h4
  text "-" at 517.565,11.454 h70
Bottom Overlay:
  drawing of 45 lines, arcs and shapes, not listed
  text "Accumulator HotDog" at 176.336,26.176 h20
  text "Inass Himmiche & Bernie HW - 2024" at 311.746,6.75 h6
  text "Powertrain Never Rests" at 466.921,6.25 h8

## Text inside footprints (layer, text, board x,y; h text height)
J101: Top Overlay "1" at 495.6,43.585 h4 r270; Top Overlay "13" at 495.6,13.545 h4 r270
J102: Top Overlay "8" at 376.25,12 h4; Top Overlay "1" at 394.5,12 h4
J201: Top Overlay "1" at 330.6,43.585 h4 r270; Top Overlay "13" at 330.6,13.545 h4 r270
J202: Top Overlay "1" at 229.25,12 h4; Top Overlay "8" at 211.25,12 h4
J301: Top Overlay "1" at 165.6,43.585 h4 r270; Top Overlay "13" at 165.6,13.545 h4 r270
J302: Top Overlay "8" at 45.5,12.25 h4; Top Overlay "1" at 64.5,12.25 h4